# Altium PCB MotorDriverBoard.PcbDoc (part 2 of 2)
Units mm, origin at the board's own origin, x right, y up, seen from the top; angles counter-clockwise.
Board outline 100 x 50 mm, 2 copper layers (Top Layer, Bottom Layer), stack 1.571 mm thick; 192 components, 176 nets, 653 pads, 1194 vias.
Unrouted connection lines stored in the file: 1.
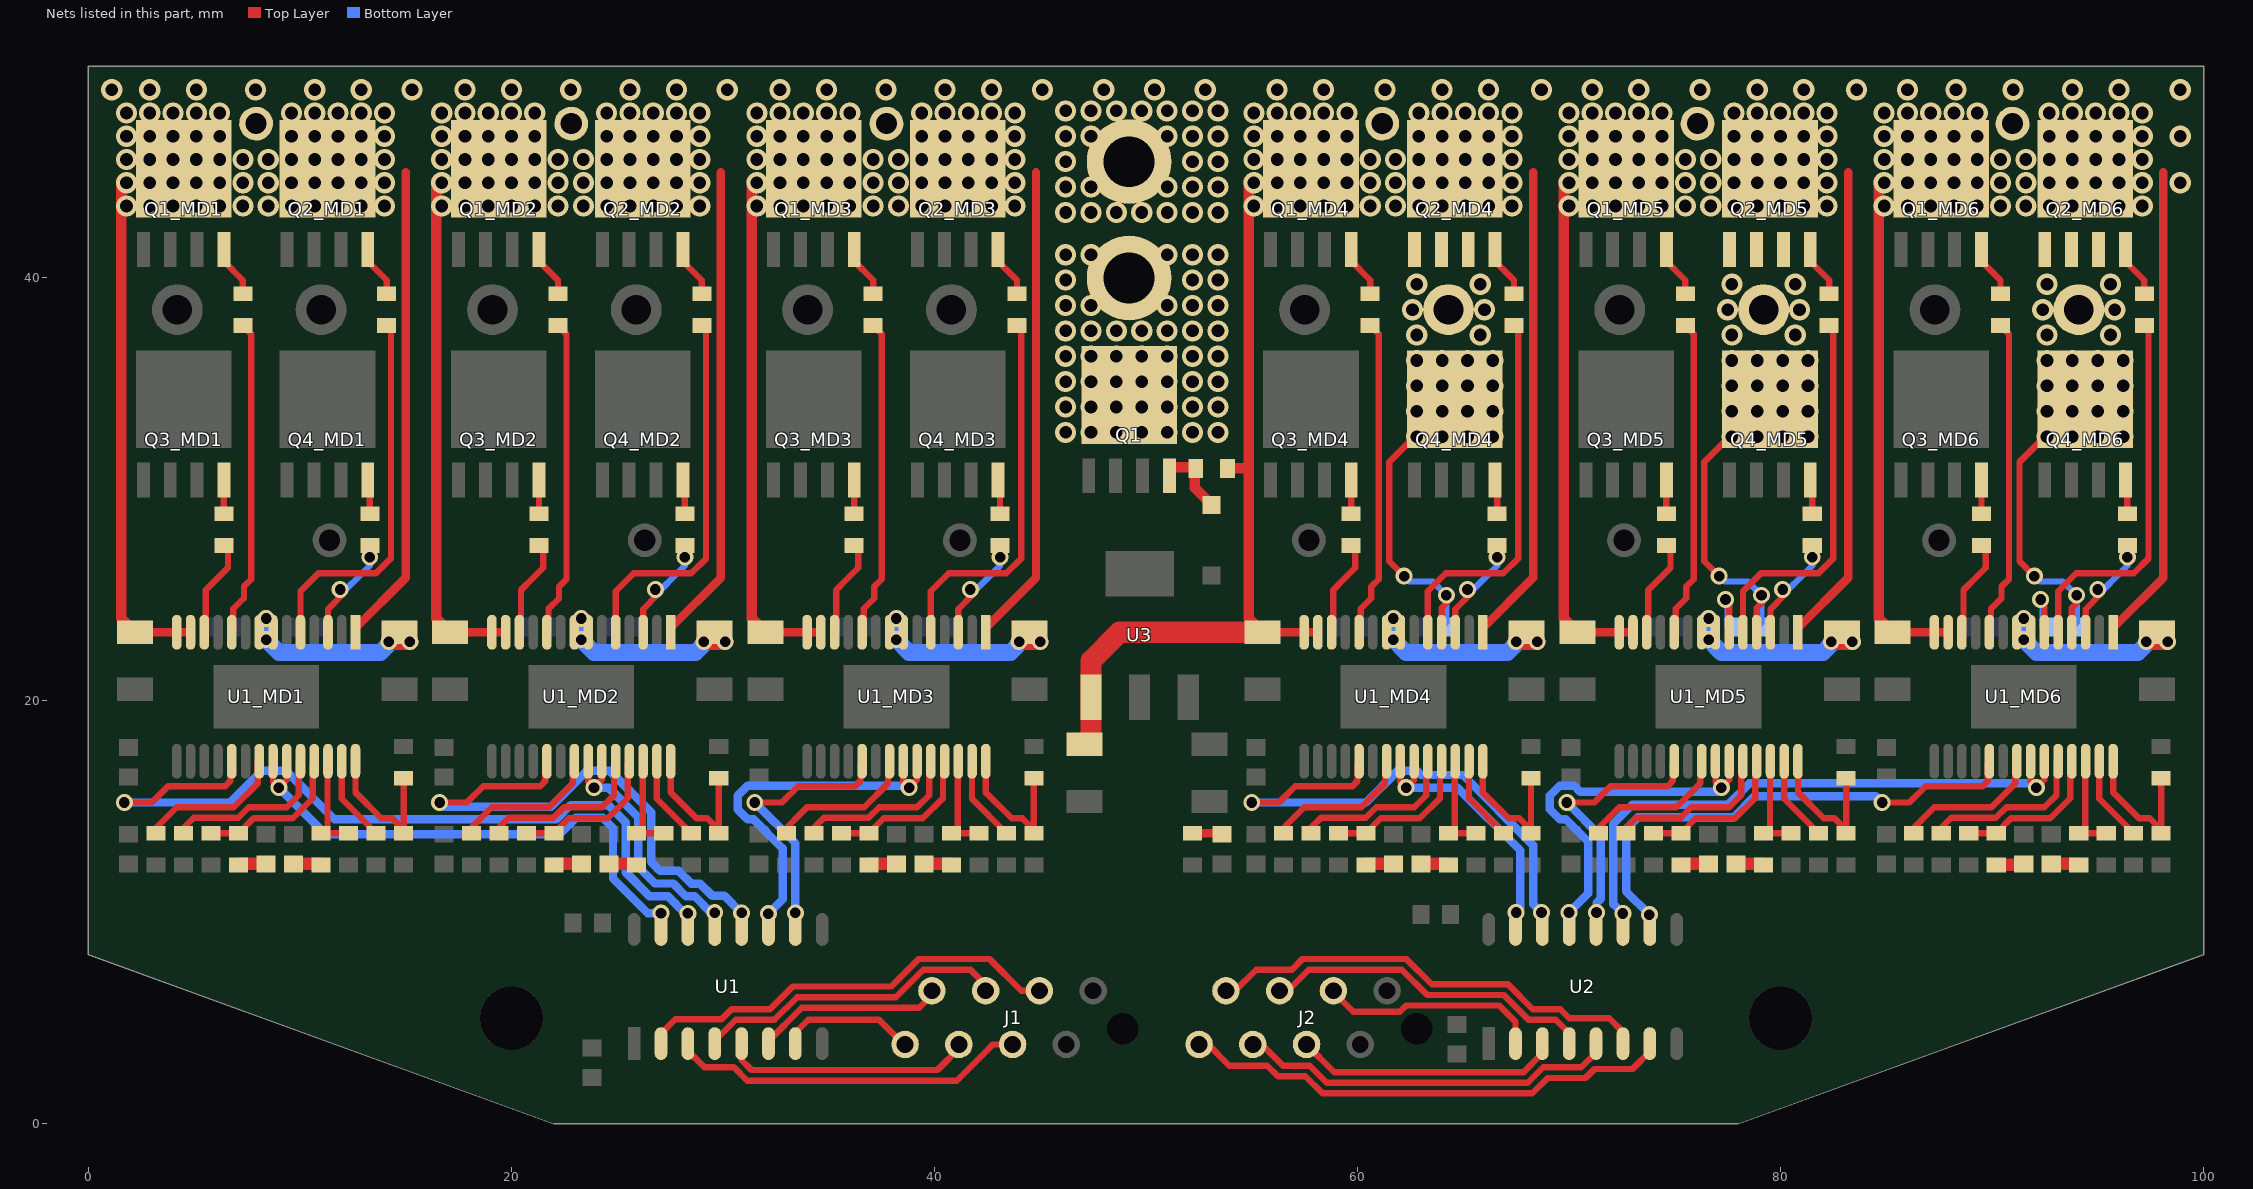
[diagram p2: the nets of this part, all layers, seen from the top]

## Via types
v1: diameter 1, hole 0.6, Top Layer to Bottom Layer, 1041 vias
v2: diameter 0.8, hole 0.5, Top Layer to Bottom Layer, 153 vias

## Nets (pads, with @x,y where several pads share a name; then routed paths per layer and width w, separated by ;. In a path a pad name is that pad's centre, name@x,y a point inside that pad or via, vN(x,y) a via of type N, cw(c..) or ccw(c..) an arc to the next point about the centre after c; other vN are vias at no path point) (continued)
NetC4_MD4_2: C4_MD4.2 J2_MD4.1 Q2_MD4.S Q4_MD4.D U1_MD4.4 | length 16.9
  Top Layer w0.3: v2(62.2,25.9) 61.5,26.6 61.5,31.3 64.468,34.268 Q4_MD4.D@64.6,34.268 Q4_MD4.D@65.7,34.268 ; U1_MD4.4@63.975,23.25 63.975,24.401 64.2,24.626 v2(64.2,25)
  Bottom Layer w0.3: v2(62.2,25.9) 62.45,25.65 63.55,25.65 v2(64.2,25) 64.2,23.7 C4_MD4.2@64,23.5
  other v1: 62.8,32.5 64,32.5 65.2,32.5 66.4,32.5 62.8,33.7 64,33.7 65.2,33.7 66.4,33.7 62.8,34.9 64,34.9 65.2,34.9 66.4,34.9 62.8,36.1 64,36.1 65.2,36.1 66.4,36.1 62.8,37.3 65.8,37.3 62.6,38.5 66,38.5 62.8,39.7 65.8,39.7
NetC4_MD5_1: C4_MD5.1 U1_MD5.6 | length 3.2
  Top Layer w0.3: v2(77.4,24.8) 77.6,24.8 77.575,24.825 U1_MD5.6@77.575,23.25
  Bottom Layer w0.3: v2(77.4,24.8) 77.5,24.8 C4_MD5.1@77.5,23.5
NetC4_MD5_2: C4_MD5.2 J2_MD5.1 Q2_MD5.S Q4_MD5.D U1_MD5.4 | length 16.9
  Top Layer w0.3: v2(77.1,25.9) 76.4,26.6 76.4,31.3 79.368,34.268 Q4_MD5.D@79.5,34.268 Q4_MD5.D@80.6,34.268 ; U1_MD5.4@78.875,23.25 78.875,24.401 79.1,24.626 v2(79.1,25)
  Bottom Layer w0.3: v2(77.1,25.9) 77.35,25.65 78.45,25.65 v2(79.1,25) 79.1,23.7 C4_MD5.2@78.9,23.5
  other v1: 77.7,32.5 78.9,32.5 80.1,32.5 81.3,32.5 77.7,33.7 78.9,33.7 80.1,33.7 81.3,33.7 77.7,34.9 78.9,34.9 80.1,34.9 81.3,34.9 77.7,36.1 78.9,36.1 80.1,36.1 81.3,36.1 77.7,37.3 80.7,37.3 77.5,38.5 80.9,38.5 77.7,39.7 80.7,39.7
NetC4_MD6_1: C4_MD6.1 U1_MD6.6 | length 3.2
  Top Layer w0.3: v2(92.3,24.8) 92.5,24.8 92.475,24.825 U1_MD6.6@92.475,23.25
  Bottom Layer w0.3: v2(92.3,24.8) 92.4,24.8 C4_MD6.1@92.4,23.5
NetC4_MD6_2: C4_MD6.2 J2_MD6.1 Q2_MD6.S Q4_MD6.D U1_MD6.4 | length 16.9
  Top Layer w0.3: v2(92,25.9) 91.3,26.6 91.3,31.3 94.268,34.268 Q4_MD6.D@94.4,34.268 Q4_MD6.D@95.5,34.268 ; U1_MD6.4@93.775,23.25 93.775,24.401 94,24.626 v2(94,25)
  Bottom Layer w0.3: v2(92,25.9) 92.25,25.65 93.35,25.65 v2(94,25) 94,23.7 C4_MD6.2@93.8,23.5
  other v1: 92.6,32.5 93.8,32.5 95,32.5 96.2,32.5 92.6,33.7 93.8,33.7 95,33.7 96.2,33.7 92.6,34.9 93.8,34.9 95,34.9 96.2,34.9 92.6,36.1 93.8,36.1 95,36.1 96.2,36.1 92.6,37.3 95.6,37.3 92.4,38.5 95.8,38.5 92.6,39.7 95.6,39.7
NetC5_MD1_2: C5_MD1.2 U1_MD1.7 U1_MD1.8 | length 10
  Top Layer w0.8: C5_MD1.2@14.7,23.25 v2(14.2,22.8) v2(15.2,22.8)
  Bottom Layer w0.8: v2(8.4,23.9) v2(8.4,22.9) 9,22.3 13.8,22.3 14.2,22.7 v2(14.2,22.8) v2(15.2,22.8)
NetC5_MD2_2: C5_MD2.2 U1_MD2.7 U1_MD2.8 | length 10
  Top Layer w0.8: C5_MD2.2@29.6,23.25 v2(29.1,22.8) v2(30.1,22.8)
  Bottom Layer w0.8: v2(23.3,23.9) v2(23.3,22.9) 23.9,22.3 28.7,22.3 29.1,22.7 v2(29.1,22.8) v2(30.1,22.8)
NetC5_MD3_2: C5_MD3.2 U1_MD3.7 U1_MD3.8 | length 10
  Top Layer w0.8: C5_MD3.2@44.5,23.25 v2(44,22.8) v2(45,22.8)
  Bottom Layer w0.8: v2(38.2,23.9) v2(38.2,22.9) 38.8,22.3 43.6,22.3 44,22.7 v2(44,22.8) v2(45,22.8)
NetC5_MD4_2: C5_MD4.2 U1_MD4.7 U1_MD4.8 | length 10
  Top Layer w0.8: C5_MD4.2@68,23.25 v2(67.5,22.8) v2(68.5,22.8)
  Bottom Layer w0.8: v2(61.7,23.9) v2(61.7,22.9) 62.3,22.3 67.1,22.3 67.5,22.7 v2(67.5,22.8) v2(68.5,22.8)
NetC5_MD5_2: C5_MD5.2 U1_MD5.7 U1_MD5.8 | length 10
  Top Layer w0.8: C5_MD5.2@82.9,23.25 v2(82.4,22.8) v2(83.4,22.8)
  Bottom Layer w0.8: v2(76.6,23.9) v2(76.6,22.9) 77.2,22.3 82,22.3 82.4,22.7 v2(82.4,22.8) v2(83.4,22.8)
NetC5_MD6_2: C5_MD6.2 U1_MD6.7 U1_MD6.8 | length 10
  Top Layer w0.8: C5_MD6.2@97.8,23.25 v2(97.3,22.8) v2(98.3,22.8)
  Bottom Layer w0.8: v2(91.5,23.9) v2(91.5,22.9) 92.1,22.3 96.9,22.3 97.3,22.7 v2(97.3,22.8) v2(98.3,22.8)
NetD1_2: D1.2 R2.1 | length 1.4
  Top Layer w0.4: R2.1@52.2,13.75 53.55,13.75 D1.2@53.6,13.7
NetD1_MD1_2: D1_MD1.2 R12_MD1.2 | length 1.3
  Top Layer w0.6: R12_MD1.2@7.1,12.25 7.15,12.3 D1_MD1.2@8.4,12.3
NetD1_MD2_2: D1_MD2.2 R12_MD2.2 | length 1.3
  Top Layer w0.6: R12_MD2.2@22,12.25 22.05,12.3 D1_MD2.2@23.3,12.3
NetD1_MD3_2: D1_MD3.2 R12_MD3.2 | length 1.3
  Top Layer w0.6: R12_MD3.2@36.9,12.25 36.95,12.3 D1_MD3.2@38.2,12.3
NetD1_MD4_2: D1_MD4.2 R12_MD4.2 | length 1.3
  Top Layer w0.6: R12_MD4.2@60.4,12.25 60.45,12.3 D1_MD4.2@61.7,12.3
NetD1_MD5_2: D1_MD5.2 R12_MD5.2 | length 1.3
  Top Layer w0.6: R12_MD5.2@75.3,12.25 75.35,12.3 D1_MD5.2@76.6,12.3
NetD1_MD6_2: D1_MD6.2 R12_MD6.2 | length 1.3
  Top Layer w0.6: R12_MD6.2@90.2,12.25 91.45,12.25 D1_MD6.2@91.5,12.3
NetD2_1: D2.1 Q1.G R1.1 | length 3.3
  Top Layer w0.5: Q1.G@51.105,31.05 52.3,31.05 52.3,30.075 D2.1@53.1,29.275
NetD2_MD1_2: D2_MD1.2 R13_MD1.1 | length 1.3
  Top Layer w0.6: D2_MD1.2@9.7,12.3 10.95,12.3 R13_MD1.1@11,12.25
NetD2_MD2_2: D2_MD2.2 R13_MD2.1 | length 1.3
  Top Layer w0.6: D2_MD2.2@24.6,12.3 25.85,12.3 R13_MD2.1@25.9,12.25
NetD2_MD3_2: D2_MD3.2 R13_MD3.1 | length 1.3
  Top Layer w0.6: D2_MD3.2@39.5,12.3 40.75,12.3 R13_MD3.1@40.8,12.25
NetD2_MD4_2: D2_MD4.2 R13_MD4.1 | length 1.3
  Top Layer w0.6: D2_MD4.2@63,12.3 64.25,12.3 R13_MD4.1@64.3,12.25
NetD2_MD5_2: D2_MD5.2 R13_MD5.1 | length 1.3
  Top Layer w0.6: D2_MD5.2@77.9,12.3 79.15,12.3 R13_MD5.1@79.2,12.25
NetD2_MD6_2: D2_MD6.2 R13_MD6.1 | length 1.3
  Top Layer w0.6: D2_MD6.2@92.8,12.3 94.05,12.3 R13_MD6.1@94.1,12.25
NetJ1_3: J1.3 U1.2 | length 20.5
  Top Layer w0.3: U1.2@27.07,3.8 27.022,4.222 27.751,4.951 29.929,4.951 30.404,5.425 32.225,5.425 33.3,6.5 37.959,6.5 39.259,7.8 42.6,7.8 44.1,6.3 J1.3@44.96,6.3
NetJ1_4: J1.4 U1.3 | length 16.7
  Top Layer w0.3: U1.3@28.3,3.5 29.125,2.675 30.518,2.675 31.143,2.05 41.054,2.05 42.35,3.346 42.35,3.35 42.76,3.76 J1.4@43.69,3.76
NetJ1_5: J1.5 U1.4 | length 15
  Top Layer w0.3: U1.4@29.61,3.8 29.595,3.909 30.611,4.925 32.432,4.925 33.507,6 38.166,6 39.466,7.3 41.7,7.3 42.52,6.48 42.52,6.4 J1.5@42.62,6.3
NetJ1_6: J1.6 U1.5 | length 11.8
  Top Layer w0.3: U1.5@30.88,3.8 30.88,3.02 31.35,2.55 40.14,2.55 J1.6@41.25,3.66
NetJ1_7: J1.7 U1.6 | length 9
  Top Layer w0.3: U1.6@32.15,3.8 32.15,3.924 33.726,5.5 39.28,5.5 J1.7@40.08,6.3
NetJ1_8: J1.8 U1.7 | length 6.7
  Top Layer w0.3: U1.7@33.42,3.8 33.363,4.263 34.025,4.925 37.375,4.925 38.54,3.76 J1.8@38.81,3.76
NetJ2_3: J2.3 U2.2 | length 10.7
  Top Layer w0.3: J2.3@58.83,6.27 59.8,5.3 62,5.3 62.3,5.6 66.7,5.6 67.47,4.83 U2.2@67.47,3.6
NetJ2_4: J2.4 U2.3 | length 12.3
  Top Layer w0.3: J2.4@57.59,3.76 58.9,2.45 67.85,2.45 68.74,3.34 U2.3@68.74,3.6
NetJ2_5: J2.5 U2.4 | length 16
  Top Layer w0.3: J2.5@56.32,6.3 56.7,6.3 57.7,7.3 62.1,7.3 63.3,6.1 66.907,6.1 68.082,4.925 69.375,4.925 69.893,4.407 69.893,3.717 U2.4@70.01,3.6
NetJ2_6: J2.6 U2.5 | length 18
  Top Layer w0.3: J2.6@55.05,3.76 55.476,3.76 56.476,2.76 57.74,2.76 58.55,1.95 68.057,1.95 68.782,2.675 70.575,2.675 71.28,3.38 U2.5@71.28,3.8
NetJ2_7: J2.7 U2.6 | length 21.6
  Top Layer w0.3: J2.7@53.78,6.3 54.206,6.3 55.206,7.3 56.9,7.3 57.4,7.8 62.307,7.8 63.507,6.6 67.114,6.6 68.289,5.425 69.582,5.425 70.007,5 71.9,5 72.55,4.35 U2.6@72.55,3.6
NetJ2_8: J2.8 U2.7 | length 23.5
  Top Layer w0.3: J2.8@52.51,3.76 52.936,3.76 53.936,2.76 55.74,2.76 56.24,2.26 57.533,2.26 58.343,1.45 68.264,1.45 68.989,2.175 70.782,2.175 71.207,2.6 73,2.6 73.82,3.42 U2.7@73.82,3.8
NetJ4_1: J4.1 Q1.D
  other v1: 46.2,32.7 47.4,32.7 48.6,32.7 49.8,32.7 51,32.7 52.2,32.7 53.4,32.7 46.2,33.9 47.4,33.9 48.6,33.9 49.8,33.9 51,33.9 52.2,33.9 53.4,33.9 46.2,35.1 47.4,35.1 48.6,35.1 49.8,35.1 51,35.1 52.2,35.1 53.4,35.1 46.2,36.3 47.4,36.3 48.6,36.3 49.8,36.3 51,36.3 52.2,36.3 53.4,36.3 46.2,37.5 47.4,37.5 48.6,37.5 49.8,37.5 51,37.5 52.2,37.5 53.4,37.5 46.2,38.7 47.4,38.7 51,38.7 52.2,38.7 53.4,38.7 46.2,39.9 52.2,39.9 53.4,39.9 46.2,41.1 47.4,41.1 51,41.1 52.2,41.1 53.4,41.1
NetQ1_MD1_G: Q1_MD1.G R8_MD1.2 | length 2.5
  Top Layer w0.3: Q1_MD1.G@6.405,41.35 6.405,40.905 6.35,40.85 7.3,39.9 R8_MD1.2@7.3,39.25
NetQ1_MD2_G: Q1_MD2.G R8_MD2.2 | length 2.5
  Top Layer w0.3: Q1_MD2.G@21.305,41.35 21.305,40.905 21.25,40.85 22.2,39.9 R8_MD2.2@22.2,39.25
NetQ1_MD3_G: Q1_MD3.G R8_MD3.2 | length 2.5
  Top Layer w0.3: Q1_MD3.G@36.205,41.35 36.205,40.905 36.15,40.85 37.1,39.9 R8_MD3.2@37.1,39.25
NetQ1_MD4_G: Q1_MD4.G R8_MD4.2 | length 2.5
  Top Layer w0.3: Q1_MD4.G@59.705,41.35 59.705,40.905 59.65,40.85 60.6,39.9 R8_MD4.2@60.6,39.25
NetQ1_MD5_G: Q1_MD5.G R8_MD5.2 | length 2.5
  Top Layer w0.3: Q1_MD5.G@74.605,41.35 74.605,40.905 74.55,40.85 75.5,39.9 R8_MD5.2@75.5,39.25
NetQ1_MD6_G: Q1_MD6.G R8_MD6.2 | length 2.5
  Top Layer w0.3: Q1_MD6.G@89.505,41.35 89.505,40.905 89.45,40.85 90.4,39.9 R8_MD6.2@90.4,39.25
NetQ2_MD1_G: Q2_MD1.G R9_MD1.2 | length 2.6
  Top Layer w0.3: Q2_MD1.G@13.205,41.35 13.205,40.705 13.25,40.75 14.1,39.9 R9_MD1.2@14.1,39.25
NetQ2_MD2_G: Q2_MD2.G R9_MD2.2 | length 2.6
  Top Layer w0.3: Q2_MD2.G@28.105,41.35 28.105,40.705 28.15,40.75 29,39.9 R9_MD2.2@29,39.25
NetQ2_MD3_G: Q2_MD3.G R9_MD3.2 | length 2.6
  Top Layer w0.3: Q2_MD3.G@43.005,41.35 43.005,40.705 43.05,40.75 43.9,39.9 R9_MD3.2@43.9,39.25
NetQ2_MD4_G: Q2_MD4.G R9_MD4.2 | length 2.6
  Top Layer w0.3: Q2_MD4.G@66.505,41.35 66.505,40.705 66.55,40.75 67.4,39.9 R9_MD4.2@67.4,39.25
NetQ2_MD5_G: Q2_MD5.G R9_MD5.2 | length 2.6
  Top Layer w0.3: Q2_MD5.G@81.405,41.35 81.405,40.705 81.45,40.75 82.3,39.9 R9_MD5.2@82.3,39.25
NetQ2_MD6_G: Q2_MD6.G R9_MD6.2 | length 2.6
  Top Layer w0.3: Q2_MD6.G@96.305,41.35 96.305,40.705 96.35,40.75 97.2,39.9 R9_MD6.2@97.2,39.25
NetQ3_MD1_G: Q3_MD1.G R10_MD1.2 | length 1.6
  Top Layer w0.3: R10_MD1.2@6.4,28.85 6.4,30.445 Q3_MD1.G@6.405,30.45
NetQ3_MD2_G: Q3_MD2.G R10_MD2.2 | length 1.6
  Top Layer w0.3: R10_MD2.2@21.3,28.85 21.3,30.445 Q3_MD2.G@21.305,30.45
NetQ3_MD3_G: Q3_MD3.G R10_MD3.2 | length 1.6
  Top Layer w0.3: R10_MD3.2@36.2,28.85 36.2,30.445 Q3_MD3.G@36.205,30.45
NetQ3_MD4_G: Q3_MD4.G R10_MD4.2 | length 1.6
  Top Layer w0.3: R10_MD4.2@59.7,28.85 59.7,30.445 Q3_MD4.G@59.705,30.45
NetQ3_MD5_G: Q3_MD5.G R10_MD5.2 | length 1.6
  Top Layer w0.3: R10_MD5.2@74.6,28.85 74.6,30.445 Q3_MD5.G@74.605,30.45
NetQ3_MD6_G: Q3_MD6.G R10_MD6.2 | length 1.6
  Top Layer w0.3: R10_MD6.2@89.5,28.85 89.5,30.445 Q3_MD6.G@89.505,30.45
NetQ4_MD1_G: Q4_MD1.G R11_MD1.2 | length 1.6
  Top Layer w0.3: Q4_MD1.G@13.205,30.45 13.3,30.355 R11_MD1.2@13.3,28.85
NetQ4_MD2_G: Q4_MD2.G R11_MD2.2 | length 1.6
  Top Layer w0.3: Q4_MD2.G@28.105,30.45 28.2,30.355 R11_MD2.2@28.2,28.85
NetQ4_MD3_G: Q4_MD3.G R11_MD3.2 | length 1.6
  Top Layer w0.3: Q4_MD3.G@43.005,30.45 43.1,30.355 R11_MD3.2@43.1,28.85
NetQ4_MD4_G: Q4_MD4.G R11_MD4.2 | length 1.6
  Top Layer w0.3: Q4_MD4.G@66.505,30.45 66.6,30.355 R11_MD4.2@66.6,28.85
NetQ4_MD5_G: Q4_MD5.G R11_MD5.2 | length 1.6
  Top Layer w0.3: Q4_MD5.G@81.405,30.45 81.5,30.355 R11_MD5.2@81.5,28.85
NetQ4_MD6_G: Q4_MD6.G R11_MD6.2 | length 1.6
  Top Layer w0.3: Q4_MD6.G@96.305,30.45 96.4,30.355 R11_MD6.2@96.4,28.85
NetR1_MD1_1: R1_MD1.1 U1_MD1.21 | length 7.4
  Top Layer w0.3: R1_MD1.1@3.2,13.75 2.95,13.75 4.175,14.975 6.875,14.975 8,16.1 8,17.15 U1_MD1.21@8.075,17.15
NetR1_MD2_1: R1_MD2.1 U1_MD2.21 | length 7.4
  Top Layer w0.3: R1_MD2.1@18.1,13.75 17.85,13.75 19.075,14.975 21.775,14.975 22.9,16.1 22.9,17.15 U1_MD2.21@22.975,17.15
NetR1_MD3_1: R1_MD3.1 U1_MD3.21 | length 7.4
  Top Layer w0.3: R1_MD3.1@33,13.75 32.75,13.75 33.975,14.975 36.675,14.975 37.8,16.1 37.8,17.15 U1_MD3.21@37.875,17.15
NetR1_MD4_1: R1_MD4.1 U1_MD4.21 | length 7.4
  Top Layer w0.3: R1_MD4.1@56.5,13.75 56.25,13.75 57.475,14.975 60.175,14.975 61.3,16.1 61.3,17.15 U1_MD4.21@61.375,17.15
NetR1_MD5_1: R1_MD5.1 U1_MD5.21 | length 7.4
  Top Layer w0.3: R1_MD5.1@71.4,13.75 71.15,13.75 72.375,14.975 75.075,14.975 76.2,16.1 76.2,17.15 U1_MD5.21@76.275,17.15
NetR1_MD6_1: R1_MD6.1 U1_MD6.21 | length 7.4
  Top Layer w0.3: R1_MD6.1@86.3,13.75 86.05,13.75 87.275,14.975 89.975,14.975 91.1,16.1 91.1,17.15 U1_MD6.21@91.175,17.15
NetR2_MD1_1: R2_MD1.1 U1_MD1.24 | length 8.1
  Top Layer w0.3: R2_MD1.1@4.5,13.75 4.5,14 4.975,14.475 7.082,14.475 7.582,14.975 9.375,14.975 9.95,15.55 9.95,17.15 U1_MD1.24@10.025,17.15 U1_MD1.24@9.95,17.075
NetR2_MD2_1: R2_MD2.1 U1_MD2.24 | length 8.1
  Top Layer w0.3: R2_MD2.1@19.4,13.75 19.4,14 19.875,14.475 21.982,14.475 22.482,14.975 24.275,14.975 24.85,15.55 24.85,17.15 U1_MD2.24@24.925,17.15 U1_MD2.24@24.85,17.075
NetR2_MD3_1: R2_MD3.1 U1_MD3.24 | length 8.1
  Top Layer w0.3: R2_MD3.1@34.3,13.75 34.3,14 34.775,14.475 36.882,14.475 37.382,14.975 39.175,14.975 39.75,15.55 39.75,17.15 U1_MD3.24@39.825,17.15 U1_MD3.24@39.75,17.075
NetR2_MD4_1: R2_MD4.1 U1_MD4.24 | length 8.1
  Top Layer w0.3: R2_MD4.1@57.8,13.75 57.8,14 58.275,14.475 60.382,14.475 60.882,14.975 62.675,14.975 63.25,15.55 63.25,17.15 U1_MD4.24@63.325,17.15 U1_MD4.24@63.25,17.075
NetR2_MD5_1: R2_MD5.1 U1_MD5.24 | length 8.1
  Top Layer w0.3: R2_MD5.1@72.7,13.75 72.7,14 73.175,14.475 75.282,14.475 75.782,14.975 77.575,14.975 78.15,15.55 78.15,17.15 U1_MD5.24@78.225,17.15 U1_MD5.24@78.15,17.075
NetR2_MD6_1: R2_MD6.1 U1_MD6.24 | length 8.1
  Top Layer w0.3: R2_MD6.1@87.6,13.75 87.6,14 88.075,14.475 90.182,14.475 90.682,14.975 92.475,14.975 93.05,15.55 93.05,17.15 U1_MD6.24@93.125,17.15 U1_MD6.24@93.05,17.075
NetR3_MD1_1: R3_MD1.1 R6_MD1.1 U1_MD1.28 | length 6.9
  Top Layer w0.3: U1_MD1.28@12.625,17.15 12.625,15.675 13.85,14.45 14.35,14.45 14.9,13.9 R6_MD1.1@14.9,16.35
NetR3_MD2_1: R3_MD2.1 R6_MD2.1 U1_MD2.28 | length 6.9
  Top Layer w0.3: U1_MD2.28@27.525,17.15 27.525,15.675 28.75,14.45 29.25,14.45 29.8,13.9 R6_MD2.1@29.8,16.35
NetR3_MD3_1: R3_MD3.1 R6_MD3.1 U1_MD3.28 | length 6.9
  Top Layer w0.3: U1_MD3.28@42.425,17.15 42.425,15.675 43.65,14.45 44.15,14.45 44.7,13.9 R6_MD3.1@44.7,16.35
NetR3_MD4_1: R3_MD4.1 R6_MD4.1 U1_MD4.28 | length 6.9
  Top Layer w0.3: U1_MD4.28@65.925,17.15 65.925,15.675 67.15,14.45 67.65,14.45 68.2,13.9 R6_MD4.1@68.2,16.35
NetR3_MD5_1: R3_MD5.1 R6_MD5.1 U1_MD5.28 | length 6.9
  Top Layer w0.3: U1_MD5.28@80.825,17.15 80.825,15.675 82.05,14.45 82.55,14.45 83.1,13.9 R6_MD5.1@83.1,16.35
NetR3_MD6_1: R3_MD6.1 R6_MD6.1 U1_MD6.28 | length 6.9
  Top Layer w0.3: U1_MD6.28@95.725,17.15 95.725,15.675 96.95,14.45 97.45,14.45 98,13.9 R6_MD6.1@98,16.35
NetR4_MD1_1: R4_MD1.1 R12_MD1.1 U1_MD1.25 | length 7.3
  Top Layer w0.3: R4_MD1.1@5.8,13.75 R12_MD1.1@7.1,13.75 7.8,14.45 9.65,14.45 10.6,15.4 10.6,17.075 U1_MD1.25@10.675,17.15
NetR4_MD2_1: R4_MD2.1 R12_MD2.1 U1_MD2.25 | length 7.3
  Top Layer w0.3: R4_MD2.1@20.7,13.75 R12_MD2.1@22,13.75 22.7,14.45 24.55,14.45 25.5,15.4 25.5,17.075 U1_MD2.25@25.575,17.15
NetR4_MD3_1: R4_MD3.1 R12_MD3.1 U1_MD3.25 | length 7.3
  Top Layer w0.3: R4_MD3.1@35.6,13.75 R12_MD3.1@36.9,13.75 37.6,14.45 39.45,14.45 40.4,15.4 40.4,17.075 U1_MD3.25@40.475,17.15
NetR4_MD4_1: R4_MD4.1 R12_MD4.1 U1_MD4.25 | length 7.3
  Top Layer w0.3: R4_MD4.1@59.1,13.75 R12_MD4.1@60.4,13.75 61.1,14.45 62.95,14.45 63.9,15.4 63.9,17.075 U1_MD4.25@63.975,17.15
NetR4_MD5_1: R4_MD5.1 R12_MD5.1 U1_MD5.25 | length 7.3
  Top Layer w0.3: R4_MD5.1@74,13.75 R12_MD5.1@75.3,13.75 76,14.45 77.85,14.45 78.8,15.4 78.8,17.075 U1_MD5.25@78.875,17.15
NetR4_MD6_1: R4_MD6.1 R12_MD6.1 U1_MD6.25 | length 7.3
  Top Layer w0.3: R4_MD6.1@88.9,13.75 R12_MD6.1@90.2,13.75 90.9,14.45 92.75,14.45 93.7,15.4 93.7,17.075 U1_MD6.25@93.775,17.15
NetR5_MD1_1: R5_MD1.1 R13_MD1.2 U1_MD1.26 | length 4.8
  Top Layer w0.3: U1_MD1.26@11.325,17.15 11.3,17.125 11.3,14.05 R13_MD1.2@11,13.75 R5_MD1.1@12.3,13.75
NetR5_MD2_1: R5_MD2.1 R13_MD2.2 U1_MD2.26 | length 4.8
  Top Layer w0.3: U1_MD2.26@26.225,17.15 26.2,17.125 26.2,14.05 R13_MD2.2@25.9,13.75 R5_MD2.1@27.2,13.75
NetR5_MD3_1: R5_MD3.1 R13_MD3.2 U1_MD3.26 | length 4.8
  Top Layer w0.3: U1_MD3.26@41.125,17.15 41.1,17.125 41.1,14.05 R13_MD3.2@40.8,13.75 R5_MD3.1@42.1,13.75
NetR5_MD4_1: R5_MD4.1 R13_MD4.2 U1_MD4.26 | length 4.8
  Top Layer w0.3: U1_MD4.26@64.625,17.15 64.6,17.125 64.6,14.05 R13_MD4.2@64.3,13.75 R5_MD4.1@65.6,13.75
NetR5_MD5_1: R5_MD5.1 R13_MD5.2 U1_MD5.26 | length 4.8
  Top Layer w0.3: U1_MD5.26@79.525,17.15 79.5,17.125 79.5,14.05 R13_MD5.2@79.2,13.75 R5_MD5.1@80.5,13.75
NetR5_MD6_1: R5_MD6.1 R13_MD6.2 U1_MD6.26 | length 4.8
  Top Layer w0.3: U1_MD6.26@94.425,17.15 94.4,17.125 94.4,14.05 R13_MD6.2@94.1,13.75 R5_MD6.1@95.4,13.75
NetR7_MD1_1: R7_MD1.1 U1_MD1.27 | length 4.1
  Top Layer w0.3: U1_MD1.27@11.975,17.15 11.975,15.375 R7_MD1.1@13.6,13.75
NetR7_MD2_1: R7_MD2.1 U1_MD2.27 | length 4.1
  Top Layer w0.3: U1_MD2.27@26.875,17.15 26.875,15.375 R7_MD2.1@28.5,13.75
NetR7_MD3_1: R7_MD3.1 U1_MD3.27 | length 4.1
  Top Layer w0.3: U1_MD3.27@41.775,17.15 41.775,15.375 R7_MD3.1@43.4,13.75
NetR7_MD4_1: R7_MD4.1 U1_MD4.27 | length 4.1
  Top Layer w0.3: U1_MD4.27@65.275,17.15 65.275,15.375 R7_MD4.1@66.9,13.75
NetR7_MD5_1: R7_MD5.1 U1_MD5.27 | length 4.1
  Top Layer w0.3: U1_MD5.27@80.175,17.15 80.175,15.375 R7_MD5.1@81.8,13.75
NetR7_MD6_1: R7_MD6.1 U1_MD6.27 | length 4.1
  Top Layer w0.3: U1_MD6.27@95.075,17.15 95.075,15.375 R7_MD6.1@96.7,13.75
NetR8_MD1_1: R8_MD1.1 U1_MD1.10 | length 15
  Top Layer w0.3: U1_MD1.10@6.775,23.25 6.85,23.325 6.85,24.364 7.35,24.864 7.35,25.411 7.7,25.761 7.7,37.35 R8_MD1.1@7.3,37.75
NetR8_MD2_1: R8_MD2.1 U1_MD2.10 | length 15
  Top Layer w0.3: U1_MD2.10@21.675,23.25 21.75,23.325 21.75,24.364 22.25,24.864 22.25,25.411 22.6,25.761 22.6,37.35 R8_MD2.1@22.2,37.75
NetR8_MD3_1: R8_MD3.1 U1_MD3.10 | length 15
  Top Layer w0.3: U1_MD3.10@36.575,23.25 36.65,23.325 36.65,24.364 37.15,24.864 37.15,25.411 37.5,25.761 37.5,37.35 R8_MD3.1@37.1,37.75
NetR8_MD4_1: R8_MD4.1 U1_MD4.10 | length 15
  Top Layer w0.3: U1_MD4.10@60.075,23.25 60.15,23.325 60.15,24.364 60.65,24.864 60.65,25.411 61,25.761 61,37.35 R8_MD4.1@60.6,37.75
NetR8_MD5_1: R8_MD5.1 U1_MD5.10 | length 15
  Top Layer w0.3: U1_MD5.10@74.975,23.25 75.05,23.325 75.05,24.364 75.55,24.864 75.55,25.411 75.9,25.761 75.9,37.35 R8_MD5.1@75.5,37.75
NetR8_MD6_1: R8_MD6.1 U1_MD6.10 | length 15
  Top Layer w0.3: U1_MD6.10@89.875,23.25 89.95,23.325 89.95,24.364 90.45,24.864 90.45,25.411 90.8,25.761 90.8,37.35 R8_MD6.1@90.4,37.75
NetR9_MD1_1: R9_MD1.1 U1_MD1.5 | length 17.9
  Top Layer w0.3: U1_MD1.5@10.025,23.25 10.025,25.186 10.875,26.036 13.597,26.036 14.3,26.739 14.3,37.55 R9_MD1.1@14.1,37.75
NetR9_MD2_1: R9_MD2.1 U1_MD2.5 | length 17.9
  Top Layer w0.3: U1_MD2.5@24.925,23.25 24.925,25.186 25.775,26.036 28.497,26.036 29.2,26.739 29.2,37.55 R9_MD2.1@29,37.75
NetR9_MD3_1: R9_MD3.1 U1_MD3.5 | length 17.9
  Top Layer w0.3: U1_MD3.5@39.825,23.25 39.825,25.186 40.675,26.036 43.397,26.036 44.1,26.739 44.1,37.55 R9_MD3.1@43.9,37.75
NetR9_MD4_1: R9_MD4.1 U1_MD4.5 | length 17.9
  Top Layer w0.3: U1_MD4.5@63.325,23.25 63.325,25.186 64.175,26.036 66.897,26.036 67.6,26.739 67.6,37.55 R9_MD4.1@67.4,37.75
NetR9_MD5_1: R9_MD5.1 U1_MD5.5 | length 17.9
  Top Layer w0.3: U1_MD5.5@78.225,23.25 78.225,25.186 79.075,26.036 81.797,26.036 82.5,26.739 82.5,37.55 R9_MD5.1@82.3,37.75
NetR9_MD6_1: R9_MD6.1 U1_MD6.5 | length 17.9
  Top Layer w0.3: U1_MD6.5@93.125,23.25 93.125,25.186 93.975,26.036 96.697,26.036 97.4,26.739 97.4,37.55 R9_MD6.1@97.2,37.75
NetR10_MD1_1: R10_MD1.1 U1_MD1.12 | length 5
  Top Layer w0.3: U1_MD1.12@5.475,23.25 5.55,23.325 5.55,24.088 5.55,25.25 6.1,25.8 6.6,26.3 6.6,27.55 R10_MD1.1@6.4,27.35
NetR10_MD2_1: R10_MD2.1 U1_MD2.12 | length 5
  Top Layer w0.3: U1_MD2.12@20.375,23.25 20.45,23.325 20.45,24.088 20.45,25.25 21,25.8 21.5,26.3 21.5,27.55 R10_MD2.1@21.3,27.35
NetR10_MD3_1: R10_MD3.1 U1_MD3.12 | length 5
  Top Layer w0.3: U1_MD3.12@35.275,23.25 35.35,23.325 35.35,24.088 35.35,25.25 35.9,25.8 36.4,26.3 36.4,27.55 R10_MD3.1@36.2,27.35
NetR10_MD4_1: R10_MD4.1 U1_MD4.12 | length 5
  Top Layer w0.3: U1_MD4.12@58.775,23.25 58.85,23.325 58.85,24.088 58.85,25.25 59.4,25.8 59.9,26.3 59.9,27.55 R10_MD4.1@59.7,27.35
NetR10_MD5_1: R10_MD5.1 U1_MD5.12 | length 5
  Top Layer w0.3: U1_MD5.12@73.675,23.25 73.75,23.325 73.75,24.088 73.75,25.25 74.3,25.8 74.8,26.3 74.8,27.55 R10_MD5.1@74.6,27.35
NetR10_MD6_1: R10_MD6.1 U1_MD6.12 | length 5
  Top Layer w0.3: U1_MD6.12@88.575,23.25 88.65,23.325 88.65,24.088 88.65,25.25 89.2,25.8 89.7,26.3 89.7,27.55 R10_MD6.1@89.5,27.35
NetR11_MD1_1: R11_MD1.1 U1_MD1.3 | length 5.2
  Top Layer w0.3: U1_MD1.3@11.325,23.25 11.325,24.343 12,25.018 11.9,25.118 v2(11.9,25.272) ; v2(13.3,26.8) R11_MD1.1@13.3,27.35
  Bottom Layer w0.3: v2(11.9,25.272) 12.172,25.272 12.8,25.9 13.3,26.4 v2(13.3,26.8)
NetR11_MD2_1: R11_MD2.1 U1_MD2.3 | length 5.2
  Top Layer w0.3: U1_MD2.3@26.225,23.25 26.225,24.343 26.9,25.018 26.8,25.118 v2(26.8,25.272) ; v2(28.2,26.8) R11_MD2.1@28.2,27.35
  Bottom Layer w0.3: v2(26.8,25.272) 27.072,25.272 27.7,25.9 28.2,26.4 v2(28.2,26.8)
NetR11_MD3_1: R11_MD3.1 U1_MD3.3 | length 5.2
  Top Layer w0.3: U1_MD3.3@41.125,23.25 41.125,24.343 41.8,25.018 41.7,25.118 v2(41.7,25.272) ; v2(43.1,26.8) R11_MD3.1@43.1,27.35
  Bottom Layer w0.3: v2(41.7,25.272) 41.972,25.272 42.6,25.9 43.1,26.4 v2(43.1,26.8)
NetR11_MD4_1: R11_MD4.1 U1_MD4.3 | length 5.2
  Top Layer w0.3: U1_MD4.3@64.625,23.25 64.625,24.343 65.3,25.018 65.2,25.118 v2(65.2,25.272) ; v2(66.6,26.8) R11_MD4.1@66.6,27.35
  Bottom Layer w0.3: v2(65.2,25.272) 65.472,25.272 66.1,25.9 66.6,26.4 v2(66.6,26.8)
NetR11_MD5_1: R11_MD5.1 U1_MD5.3 | length 5.2
  Top Layer w0.3: U1_MD5.3@79.525,23.25 79.525,24.343 80.2,25.018 80.1,25.118 v2(80.1,25.272) ; v2(81.5,26.8) R11_MD5.1@81.5,27.35
  Bottom Layer w0.3: v2(80.1,25.272) 80.372,25.272 81,25.9 81.5,26.4 v2(81.5,26.8)
NetR11_MD6_1: R11_MD6.1 U1_MD6.3 | length 5.2
  Top Layer w0.3: U1_MD6.3@94.425,23.25 94.425,24.343 95.1,25.018 95,25.118 v2(95,25.272) ; v2(96.4,26.8) R11_MD6.1@96.4,27.35
  Bottom Layer w0.3: v2(95,25.272) 95.272,25.272 95.9,25.9 96.4,26.4 v2(96.4,26.8)
NetU1_10: U1.10 U1_MD3.19 | length 13.2
  Top Layer w0.3: v2(31.5,15.2) 32.786,15.2 33.561,15.975 36.261,15.975 36.5,16.214 36.5,17.075 U1_MD3.19@36.575,17.15
  Top Layer w0.4: U1.10@33.42,9.2 v2(33.42,9.98)
  Bottom Layer w0.4: v2(31.5,15.2) 33.42,13.28 v2(33.42,9.98)
NetU1_11: U1.11 U1_MD3.22 U1_MD3.23 | length 18.8
  Top Layer w0.3: U1_MD3.22@38.525,17.15 38.525,16.175 v2(38.8,15.9) 39.175,16.275 U1_MD3.23@39.175,17.15
  Top Layer w0.4: U1.11@32.15,9.2 v2(32.15,9.95)
  Bottom Layer w0.4: v2(32.15,9.95) 32.82,10.62 32.82,13.031 31.451,14.4 31.169,14.4 30.7,14.869 30.7,15.531 31.169,16 38.7,16 v2(38.8,15.9)
NetU1_12: U1.12 U1_MD2.19 | length 26.4
  Top Layer w0.3: v2(16.6,15.2) 17.886,15.2 18.661,15.975 21.361,15.975 21.6,16.214 21.6,17.075 U1_MD2.19@21.675,17.15
  Top Layer w0.4: U1.12@30.88,9.2 v2(30.88,9.98)
  Bottom Layer w0.4: v2(16.6,15.2) 16.8,15 21.869,15 23.569,16.7 24.649,16.7 26.6,14.749 26.6,12.397 27.027,11.97 27.898,11.97 28.508,11.36 28.92,11.36 29.49,10.79 30.07,10.79 v2(30.88,9.98)
NetU1_13: U1.13 U1_MD2.22 U1_MD2.23 | length 13.1
  Top Layer w0.3: U1_MD2.22@23.625,17.15 23.625,16.175 v2(23.9,15.9) 24.275,16.275 U1_MD2.23@24.275,17.15
  Top Layer w0.4: U1.13@29.61,9.2 v2(29.61,9.99)
  Bottom Layer w0.4: v2(23.9,15.9) 24.6,15.9 26,14.5 26,12.149 26.779,11.37 27.65,11.37 28.26,10.76 28.671,10.76 29.441,9.99 v2(29.61,9.99)
NetU1_14: U1.14 U1_MD1.19 | length 39.1
  Top Layer w0.3: v2(1.7,15.2) 2.986,15.2 3.761,15.975 6.461,15.975 6.7,16.214 6.7,17.075 U1_MD1.19@6.775,17.15 ; U1.14@28.34,9.2 v2(28.34,9.96)
  Bottom Layer w0.4: v2(1.7,15.2) 6.7,15.2 8.2,16.7 9.331,16.7 11.631,14.4 22.117,14.4 22.792,15.075 24.574,15.075 25.4,14.249 25.4,11.9 26.53,10.77 27.401,10.77 28.211,9.96 v2(28.34,9.96)
NetU1_15: U1.15 U1_MD1.22 U1_MD1.23 | length 26.1
  Top Layer w0.3: U1_MD1.22@8.725,17.15 8.725,16.175 v2(9,15.9) 9.375,16.275 U1_MD1.23@9.375,17.15
  Top Layer w0.4: U1.15@27.07,9.2 v2(27.07,9.97)
  Bottom Layer w0.4: v2(9,15.9) 11.2,13.7 22.266,13.7 23.041,14.475 24.325,14.475 24.8,14 24.8,11.6 26.43,9.97 v2(27.07,9.97)
NetU1_MD4_19: U1_MD4.19 U2.14 | length 25.9
  Top Layer w0.3: v2(55,15.2) 56.286,15.2 57.061,15.975 59.761,15.975 60,16.214 60,17.075 U1_MD4.19@60.075,17.15
  Top Layer w0.4: v2(68.7,10) 68.74,9.96 U2.14@68.74,9.2
  Bottom Layer w0.4: v2(55,15.2) 60.4,15.2 61.9,16.7 62.8,16.7 63,16.5 64.98,16.5 68.3,13.18 68.3,10.4 v2(68.7,10)
NetU1_MD4_22: U1_MD4.22 U1_MD4.23 U2.15 | length 12.6
  Top Layer w0.3: U1_MD4.22@62.025,17.15 62.025,16.175 v2(62.3,15.9) 62.675,16.275 U1_MD4.23@62.675,17.15
  Top Layer w0.4: U2.15@67.4,9.9 v2(67.5,10)
  Bottom Layer w0.4: v2(62.3,15.9) 64.731,15.9 67.7,12.931 67.7,10.2 v2(67.5,10)
NetU1_MD5_19: U1_MD5.19 U2.12 | length 13.1
  Top Layer w0.3: v2(69.9,15.2) 71.186,15.2 71.961,15.975 74.661,15.975 74.9,16.214 74.9,17.075 U1_MD5.19@74.975,17.15
  Top Layer w0.4: U2.12@71.28,9.2 71.3,9.22 v2(71.3,10)
  Bottom Layer w0.4: v2(69.9,15.2) 71.5,13.6 71.5,10.651 71.3,10.451 v2(71.3,10)
NetU1_MD5_22: U1_MD5.22 U1_MD5.23 U2.13 | length 18.9
  Top Layer w0.3: U1_MD5.22@76.925,17.15 76.925,16.175 v2(77.2,15.9) 77.575,16.275 U1_MD5.23@77.575,17.15
  Top Layer w0.4: v2(70,10) 70.01,9.99 U2.13@70.01,9.2
  Bottom Layer w0.4: v2(70,10) 70.9,10.9 70.9,13.351 69.851,14.4 69.569,14.4 69.1,14.869 69.1,15.531 69.569,16 70.231,16 70.531,15.7 77,15.7 v2(77.2,15.9)
NetU1_MD6_19: U1_MD6.19 U2.10 | length 24.4
  Top Layer w0.3: v2(84.8,15.2) 86.086,15.2 86.861,15.975 89.561,15.975 89.8,16.214 89.8,17.075 U1_MD6.19@89.875,17.15
  Top Layer w0.4: U2.10@73.82,9.2 U2.10@73.82,9.88
  Bottom Layer w0.4: v2(73.8,9.9) 72.7,11 72.7,13.951 73.249,14.5 77.78,14.5 78.78,15.5 84.5,15.5 v2(84.8,15.2)
NetU1_MD6_22: U1_MD6.22 U1_MD6.23 U2.11 | length 28.1
  Top Layer w0.3: U1_MD6.22@91.825,17.15 91.825,16.175 v2(92.1,15.9) 92.475,16.275 U1_MD6.23@92.475,17.15
  Top Layer w0.4: v2(72.549,9.951) U2.11@72.6,9.9
  Bottom Layer w0.4: v2(72.549,9.951) 72.1,10.4 72.1,14.2 73,15.1 77.531,15.1 78.531,16.1 91.9,16.1 v2(92.1,15.9)
VCC: C1.2 C6_MD1.1 C6_MD2.1 C6_MD3.1 C6_MD4.1 C6_MD5.1 C6_MD6.1 C7.2 C8.2 C9.2 C10.2 C11.2 C12.2 J3.1 Q1_MD1.D Q1_MD2.D Q1_MD3.D Q1_MD4.D Q1_MD5.D Q1_MD6.D Q2_MD1.D Q2_MD2.D Q2_MD3.D Q2_MD4.D Q2_MD5.D Q2_MD6.D R1.2 U1_MD1.1 U1_MD1.13 U1_MD1.14 U1_MD2.1 U1_MD2.13 U1_MD2.14 U1_MD3.1 U1_MD3.13 U1_MD3.14 U1_MD4.1 U1_MD4.13 U1_MD4.14 U1_MD5.1 U1_MD5.13 U1_MD5.14 U1_MD6.1 U1_MD6.13 U1_MD6.14 U3.1 | length 295.6
  Top Layer w0.4: C6_MD1.1@2.2,23.25 U1_MD1.13@4.825,23.25 ; U1_MD1.1@12.625,23.25 12.625,23.451 15,25.826 15,45 ; C6_MD2.1@17.1,23.25 U1_MD2.13@19.725,23.25 ; U1_MD2.1@27.525,23.25 27.525,23.451 29.9,25.826 29.9,45 ; C6_MD3.1@32,23.25 U1_MD3.13@34.625,23.25 ; U1_MD3.1@42.425,23.25 42.425,23.451 44.8,25.826 44.8,45 ; C6_MD4.1@55.5,23.25 U1_MD4.13@58.125,23.25 ; U1_MD4.1@65.925,23.25 65.925,23.451 68.3,25.826 68.3,45 ; C6_MD5.1@70.4,23.25 U1_MD5.13@73.025,23.25 ; U1_MD5.1@80.825,23.25 80.825,23.451 83.2,25.826 83.2,45 ; C6_MD6.1@85.3,23.25 U1_MD6.13@87.925,23.25 ; U1_MD6.1@95.725,23.25 95.725,23.451 98.1,25.826 98.1,45
  Top Layer w0.5: v1@1.55,44.6 1.55,23.9 C6_MD1.1@2.2,23.25 ; v1@16.45,44.6 16.45,23.9 C6_MD2.1@17.1,23.25 ; v1@31.35,44.6 31.35,23.9 C6_MD3.1@32,23.25 ; R1.2@53.85,31 54.85,31 ; v1@54.85,44.6 54.85,23.9 C6_MD4.1@55.5,23.25 ; v1@69.75,44.6 69.75,23.9 C6_MD5.1@70.4,23.25 ; v1@84.65,44.6 84.65,23.9 C6_MD6.1@85.3,23.25
  Top Layer w1: C1.2@47.2,17.95 47.4,18.15 U3.1@47.4,20.175 47.4,21.9 48.75,23.25 C6_MD4.1@55.5,23.25
  other v1: 46.2,43.1 47.4,43.1 48.6,43.1 49.8,43.1 51,43.1 52.2,43.1 53.4,43.1 1.8,43.4 2.9,43.4 4,43.4 5.1,43.4 6.2,43.4 7.3,43.4 8.5,43.4 9.6,43.4 10.7,43.4 11.8,43.4 12.9,43.4 14,43.4 16.7,43.4 17.8,43.4 18.9,43.4 20,43.4 21.1,43.4 22.2,43.4 23.4,43.4 24.5,43.4 25.6,43.4 26.7,43.4 27.8,43.4 28.9,43.4 31.6,43.4 32.7,43.4 33.8,43.4 34.9,43.4 36,43.4 37.1,43.4 38.3,43.4 39.4,43.4 40.5,43.4 41.6,43.4 42.7,43.4 43.8,43.4 55.1,43.4 56.2,43.4 57.3,43.4 58.4,43.4 59.5,43.4 60.6,43.4 61.8,43.4 62.9,43.4 64,43.4 65.1,43.4 66.2,43.4 67.3,43.4 70,43.4 71.1,43.4 72.2,43.4 73.3,43.4 74.4,43.4 75.5,43.4 76.7,43.4 77.8,43.4 78.9,43.4 80,43.4 81.1,43.4 82.2,43.4 84.9,43.4 86,43.4 87.1,43.4 88.2,43.4 89.3,43.4 90.4,43.4 91.6,43.4 92.7,43.4 93.8,43.4 94.9,43.4 96,43.4 97.1,43.4 46.2,44.3 47.4,44.3 51,44.3 52.2,44.3 53.4,44.3 1.8,44.5 2.9,44.5 4,44.5 5.1,44.5 6.2,44.5 7.3,44.5 8.5,44.5 9.6,44.5 10.7,44.5 11.8,44.5 12.9,44.5 14,44.5 16.7,44.5 17.8,44.5 18.9,44.5 20,44.5 21.1,44.5 22.2,44.5 23.4,44.5 24.5,44.5 25.6,44.5 26.7,44.5 27.8,44.5 28.9,44.5 31.6,44.5 32.7,44.5 33.8,44.5 34.9,44.5 36,44.5 37.1,44.5 38.3,44.5 39.4,44.5 40.5,44.5 41.6,44.5 42.7,44.5 43.8,44.5 55.1,44.5 56.2,44.5 57.3,44.5 58.4,44.5 59.5,44.5 60.6,44.5 61.8,44.5 62.9,44.5 64,44.5 65.1,44.5 66.2,44.5 67.3,44.5 70,44.5 71.1,44.5 72.2,44.5 73.3,44.5 74.4,44.5 75.5,44.5 76.7,44.5 77.8,44.5 78.9,44.5 80,44.5 81.1,44.5 82.2,44.5 84.9,44.5 86,44.5 87.1,44.5 88.2,44.5 89.3,44.5 90.4,44.5 91.6,44.5 92.7,44.5 93.8,44.5 94.9,44.5 96,44.5 97.1,44.5 98.9,44.5 46.2,45.5 52.2,45.5 53.4,45.5 1.8,45.6 2.9,45.6 4,45.6 5.1,45.6 6.2,45.6 7.3,45.6 8.5,45.6 9.6,45.6 10.7,45.6 11.8,45.6 12.9,45.6 14,45.6 16.7,45.6 17.8,45.6 18.9,45.6 20,45.6 21.1,45.6 22.2,45.6 23.4,45.6 24.5,45.6 25.6,45.6 26.7,45.6 27.8,45.6 28.9,45.6 31.6,45.6 32.7,45.6 33.8,45.6 34.9,45.6 36,45.6 37.1,45.6 38.3,45.6 39.4,45.6 40.5,45.6 41.6,45.6 42.7,45.6 43.8,45.6 55.1,45.6 56.2,45.6 57.3,45.6 58.4,45.6 59.5,45.6 60.6,45.6 61.8,45.6 62.9,45.6 64,45.6 65.1,45.6 66.2,45.6 67.3,45.6 70,45.6 71.1,45.6 72.2,45.6 73.3,45.6 74.4,45.6 75.5,45.6 76.7,45.6 77.8,45.6 78.9,45.6 80,45.6 81.1,45.6 82.2,45.6 84.9,45.6 86,45.6 87.1,45.6 88.2,45.6 89.3,45.6 90.4,45.6 91.6,45.6 92.7,45.6 93.8,45.6 94.9,45.6 96,45.6 97.1,45.6 1.8,46.7 2.9,46.7 4,46.7 5.1,46.7 6.2,46.7 9.6,46.7 10.7,46.7 11.8,46.7 12.9,46.7 14,46.7 16.7,46.7 17.8,46.7 18.9,46.7 20,46.7 21.1,46.7 24.5,46.7 25.6,46.7 26.7,46.7 27.8,46.7 28.9,46.7 31.6,46.7 32.7,46.7 33.8,46.7 34.9,46.7 36,46.7 39.4,46.7 40.5,46.7 41.6,46.7 42.7,46.7 43.8,46.7 46.2,46.7 47.4,46.7 51,46.7 52.2,46.7 53.4,46.7 55.1,46.7 56.2,46.7 57.3,46.7 58.4,46.7 59.5,46.7 62.9,46.7 64,46.7 65.1,46.7 66.2,46.7 67.3,46.7 70,46.7 71.1,46.7 72.2,46.7 73.3,46.7 74.4,46.7 77.8,46.7 78.9,46.7 80,46.7 81.1,46.7 82.2,46.7 84.9,46.7 86,46.7 87.1,46.7 88.2,46.7 89.3,46.7 92.7,46.7 93.8,46.7 94.9,46.7 96,46.7 97.1,46.7 98.9,46.7 1.8,47.8 2.9,47.8 4,47.8 5.1,47.8 6.2,47.8 9.6,47.8 10.7,47.8 11.8,47.8 12.9,47.8 14,47.8 16.7,47.8 17.8,47.8 18.9,47.8 20,47.8 21.1,47.8 24.5,47.8 25.6,47.8 26.7,47.8 27.8,47.8 28.9,47.8 31.6,47.8 32.7,47.8 33.8,47.8 34.9,47.8 36,47.8 39.4,47.8 40.5,47.8 41.6,47.8 42.7,47.8 43.8,47.8 55.1,47.8 56.2,47.8 57.3,47.8 58.4,47.8 59.5,47.8 62.9,47.8 64,47.8 65.1,47.8 66.2,47.8 67.3,47.8 70,47.8 71.1,47.8 72.2,47.8 73.3,47.8 74.4,47.8 77.8,47.8 78.9,47.8 80,47.8 81.1,47.8 82.2,47.8 84.9,47.8 86,47.8 87.1,47.8 88.2,47.8 89.3,47.8 92.7,47.8 93.8,47.8 94.9,47.8 96,47.8 97.1,47.8 46.2,47.9 47.4,47.9 48.6,47.9 49.8,47.9 51,47.9 52.2,47.9 53.4,47.9 1.1,48.9 2.9,48.9 5.1,48.9 7.9,48.9 10.7,48.9 12.9,48.9 15.3,48.9 17.8,48.9 20,48.9 22.8,48.9 25.6,48.9 27.8,48.9 30.2,48.9 32.7,48.9 34.9,48.9 37.7,48.9 40.5,48.9 42.7,48.9 45.1,48.9 48,48.9 50.4,48.9 52.8,48.9 56.2,48.9 58.4,48.9 61.3,48.9 64,48.9 66.2,48.9 68.7,48.9 71.1,48.9 73.3,48.9 76.2,48.9 78.9,48.9 81.1,48.9 83.6,48.9 86,48.9 88.3,48.9 91,48.9 93.8,48.9 96,48.9 98.9,48.9
pads on no net: J1.drill J2.drill

## Polygon pours and split planes (outlines as drawn)
GND-EXT on Top Layer "Top Layer-GND-EXT" (solid, remove dead copper, pour order 66): 25,1 75.5,1 75.5,4.7 62.3,4.7 62.3,7.5 37.2,7.5 37.2,4.7 25,4.7
VCC on Top Layer "Bottom Layer-No Net" (solid, remove dead copper, pour order 96): 1,24.5 1,22.4 5.2,22.4 5.2,24.5
NetC4_MD1_2 on Top Layer "Bottom Layer-No Net" (solid, remove dead copper, pour order 90): 8,42.5 14.1,42.5 14.1,31.6 8,31.6
NetC3_MD1_2 on Top Layer "Bottom Layer-No Net" (solid, remove dead copper, pour order 78): 1.306,42.5 8,42.5 8,31.6 1.306,31.6
VCC on Top Layer "Bottom Layer-No Net" (solid, remove dead copper, pour order 71): 0.5,49.5 99.5,49.5 99.5,42.5 0.5,42.5
GND on Top Layer "Bottom Layer-No Net" (solid, remove dead copper, pour order 68): 1,24.5 1,31.6 99,31.6 99,24.5
NetJ4_1 on Top Layer "Top Layer-No Net" (solid, remove dead copper, pour order 104): 45.2,42.5 45.2,31.6 54.4,31.6 54.4,42.5 45.2,42.5
NetC3_MD2_2 on Top Layer "Bottom Layer-No Net" (solid, remove dead copper, pour order 79): 16.206,42.5 22.9,42.5 22.9,31.6 16.206,31.6
NetC4_MD2_2 on Top Layer "Bottom Layer-No Net" (solid, remove dead copper, pour order 91): 22.9,42.5 29,42.5 29,31.6 22.9,31.6
VCC on Top Layer "Bottom Layer-No Net" (solid, remove dead copper, pour order 97): 15.9,24.5 15.9,22.4 20.1,22.4 20.1,24.5
NetC3_MD3_2 on Top Layer "Bottom Layer-No Net" (solid, remove dead copper, pour order 80): 31.106,42.5 37.8,42.5 37.8,31.6 31.106,31.6
NetC4_MD3_2 on Top Layer "Bottom Layer-No Net" (solid, remove dead copper, pour order 92): 37.8,42.5 43.9,42.5 43.9,31.6 37.8,31.6
VCC on Top Layer "Bottom Layer-No Net" (solid, remove dead copper, pour order 98): 30.8,24.5 30.8,22.4 35,22.4 35,24.5
NetC3_MD4_2 on Top Layer "Bottom Layer-No Net" (solid, remove dead copper, pour order 81): 54.606,42.5 61.3,42.5 61.3,31.6 54.606,31.6
NetC4_MD4_2 on Top Layer "Bottom Layer-No Net" (solid, remove dead copper, pour order 93): 61.3,42.5 67.4,42.5 67.4,31.6 61.3,31.6
VCC on Top Layer "Bottom Layer-No Net" (solid, remove dead copper, pour order 99): 54.3,24.5 54.3,22.4 58.5,22.4 58.5,24.5
NetC3_MD5_2 on Top Layer "Bottom Layer-No Net" (solid, remove dead copper, pour order 82): 69.506,42.5 76.2,42.5 76.2,31.6 69.506,31.6
NetC4_MD5_2 on Top Layer "Bottom Layer-No Net" (solid, remove dead copper, pour order 94): 76.2,42.5 82.3,42.5 82.3,31.6 76.2,31.6
VCC on Top Layer "Bottom Layer-No Net" (solid, remove dead copper, pour order 100): 69.2,24.5 69.2,22.4 73.4,22.4 73.4,24.5
NetC3_MD6_2 on Top Layer "Bottom Layer-No Net" (solid, remove dead copper, pour order 83): 84.406,42.5 91.1,42.5 91.1,31.6 84.406,31.6
NetC4_MD6_2 on Top Layer "Bottom Layer-No Net" (solid, remove dead copper, pour order 95): 91.1,42.5 97.2,42.5 97.2,31.6 91.1,31.6
VCC on Top Layer "Bottom Layer-No Net" (solid, remove dead copper, pour order 101): 84.1,24.5 84.1,22.4 88.3,22.4 88.3,24.5
GND on Top Layer "Bottom Layer-No Net" (solid, remove dead copper, pour order 103): 0.5,24 43.3,24 43.3,24.7 54.6,24.7 54.6,24 99.5,24 99.5,8 77,8 64,8 62.5,9.5 36.3,9.5 34.8,8 22.6,8 0.5,8
GND on Bottom Layer "Bottom Layer-No Net" (solid, remove dead copper, pour order 69): 1,24.5 1,31.6 99.5,31.6 99.5,24.5
GND on Bottom Layer "Bottom Layer-No Net" (solid, remove dead copper, pour order 102): 0.5,24 0.5,8 22.6,8 34.8,8 36.3,9.5 62.5,9.5 64,8 77,8 99.5,8 99.5,24 54.8,24 54.8,24.7 43.6,24.7 43.6,24
NetC4_MD1_2 on Bottom Layer "Bottom Layer-No Net" (solid, remove dead copper, pour order 84): 8,42.5 8,31.6 15.7,31.6 15.7,42.5
NetC3_MD1_2 on Bottom Layer "Bottom Layer-No Net" (solid, remove dead copper, pour order 72): 1,42.5 1,31.6 8,31.6 8,42.5
VCC on Bottom Layer "Bottom Layer-No Net" (solid, remove dead copper, pour order 70): 0.5,49.5 0.5,42.5 99.5,42.5 99.5,49.5
GND-EXT on Bottom Layer "Bottom Layer-GND-EXT" (solid, remove dead copper, pour order 67): 25,1 75.5,1 75.5,5 62.3,5 62.3,7.5 37.2,7.5 37.2,5 25,5
NetJ4_1 on Bottom Layer "Top Layer-No Net" (solid, remove dead copper, pour order 105): 45.2,42.5 54.4,42.5 54.4,31.6 45.2,31.6 45.2,42.5
NetC3_MD2_2 on Bottom Layer "Bottom Layer-No Net" (solid, remove dead copper, pour order 73): 15.9,42.5 15.9,31.6 22.9,31.6 22.9,42.5
NetC4_MD2_2 on Bottom Layer "Bottom Layer-No Net" (solid, remove dead copper, pour order 85): 22.9,42.5 22.9,31.6 30.6,31.6 30.6,42.5
NetC3_MD3_2 on Bottom Layer "Bottom Layer-No Net" (solid, remove dead copper, pour order 74): 30.8,42.5 30.8,31.6 37.8,31.6 37.8,42.5
NetC4_MD3_2 on Bottom Layer "Bottom Layer-No Net" (solid, remove dead copper, pour order 86): 37.8,42.5 37.8,31.6 45,31.6 45,42.5
NetC3_MD4_2 on Bottom Layer "Bottom Layer-No Net" (solid, remove dead copper, pour order 75): 54.3,42.5 54.3,31.6 61.3,31.6 61.3,42.5
NetC4_MD4_2 on Bottom Layer "Bottom Layer-No Net" (solid, remove dead copper, pour order 87): 61.3,42.5 61.3,31.6 69,31.6 69,42.5
NetC3_MD5_2 on Bottom Layer "Bottom Layer-No Net" (solid, remove dead copper, pour order 76): 69.2,42.5 69.2,31.6 76.2,31.6 76.2,42.5
NetC4_MD5_2 on Bottom Layer "Bottom Layer-No Net" (solid, remove dead copper, pour order 88): 76.2,42.5 76.2,31.6 83.9,31.6 83.9,42.5
NetC3_MD6_2 on Bottom Layer "Bottom Layer-No Net" (solid, remove dead copper, pour order 77): 84.1,42.5 84.1,31.6 91.1,31.6 91.1,42.5
NetC4_MD6_2 on Bottom Layer "Bottom Layer-No Net" (solid, remove dead copper, pour order 89): 91.1,42.5 91.1,31.6 99,31.6 99,42.5

## Keep-outs
Keep-Out Layer:
  the board outline again, w0.2

## Silkscreen, mask and mechanical layers (free items; w line width, h text height)
Top Overlay:
  text "v0.2" at 83,5.5 h2